# Altium PCB Плата.PcbDoc (part 1 of 2)
Units mm, origin at the board's own origin, x right, y up, seen from the top; angles counter-clockwise.
Board outline 114.75 x 89.87 mm, 2 copper layers (Top Layer, Bottom Layer); 69 components, 75 nets, 338 pads, 343 vias.
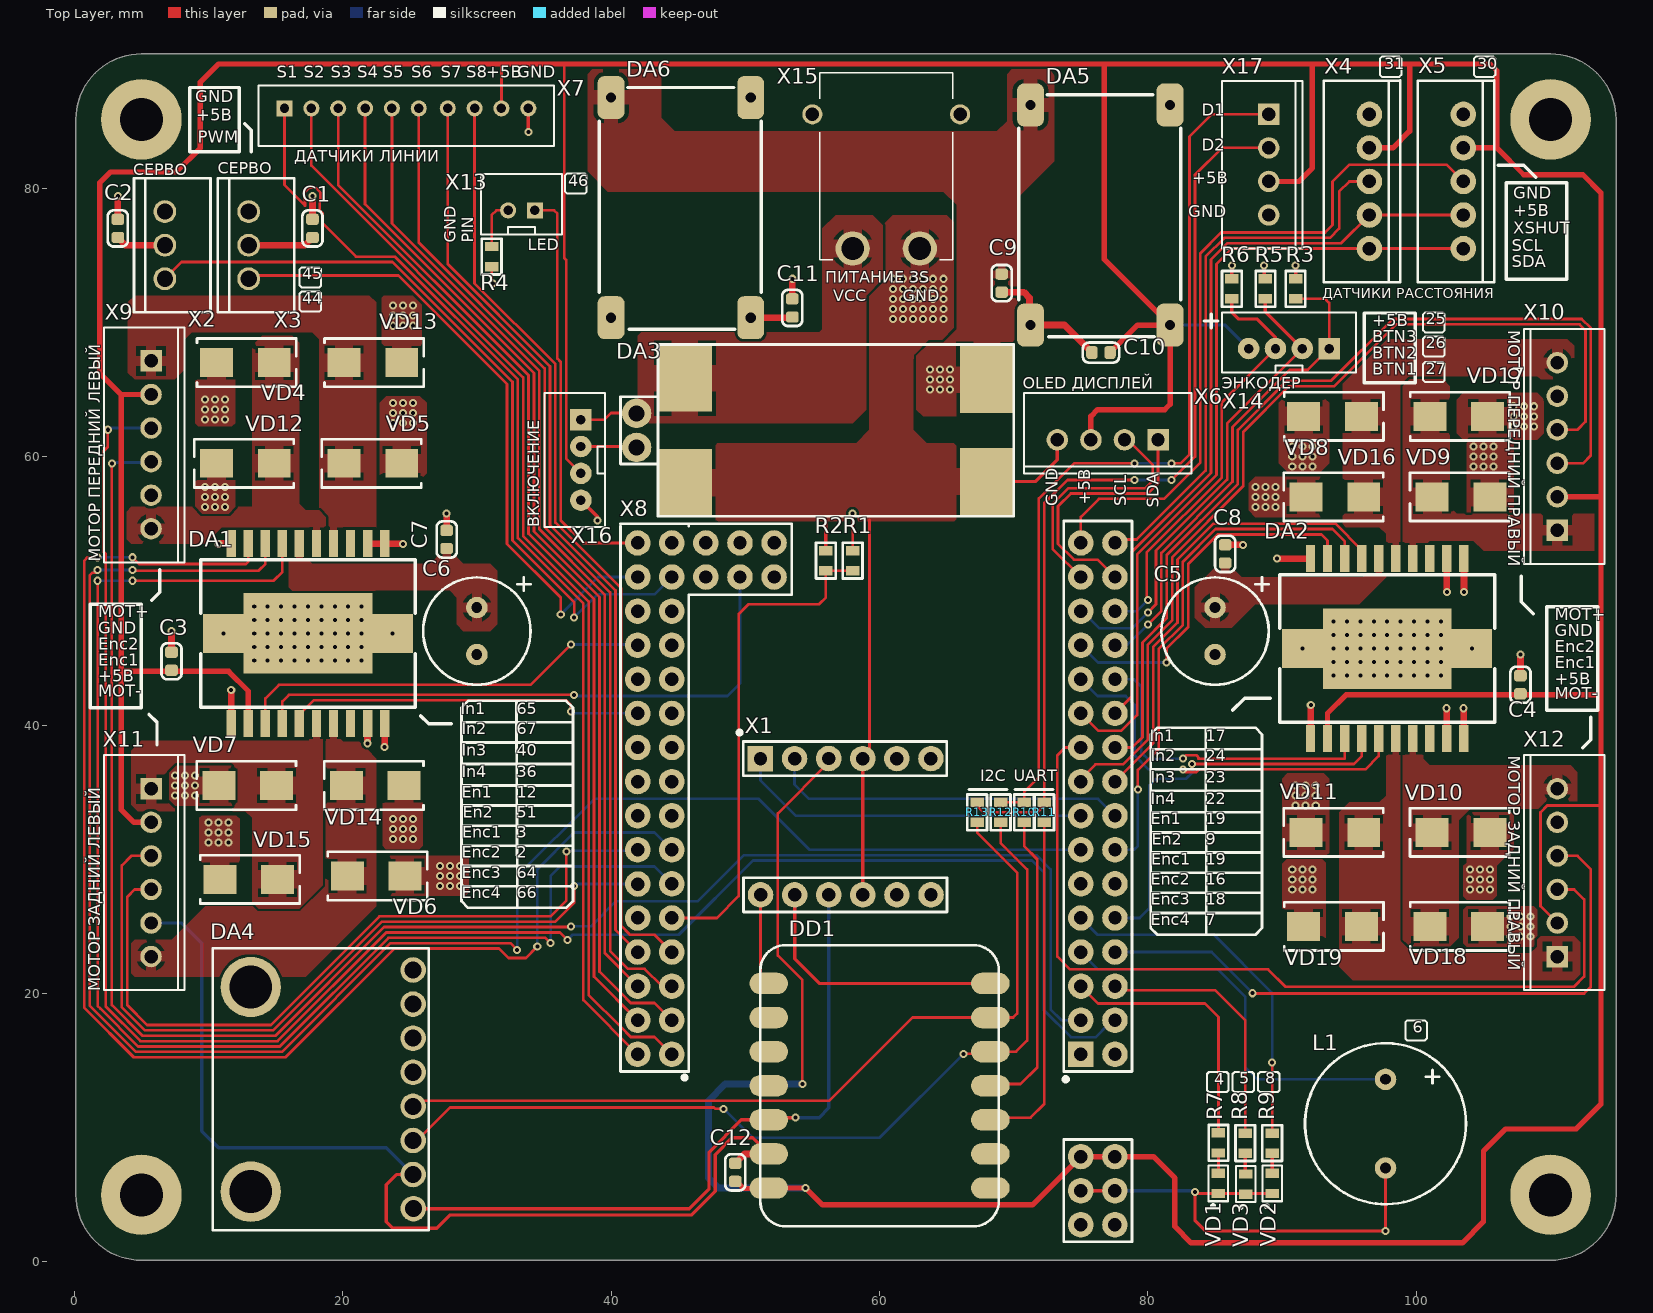
[diagram p0: Top Layer view]
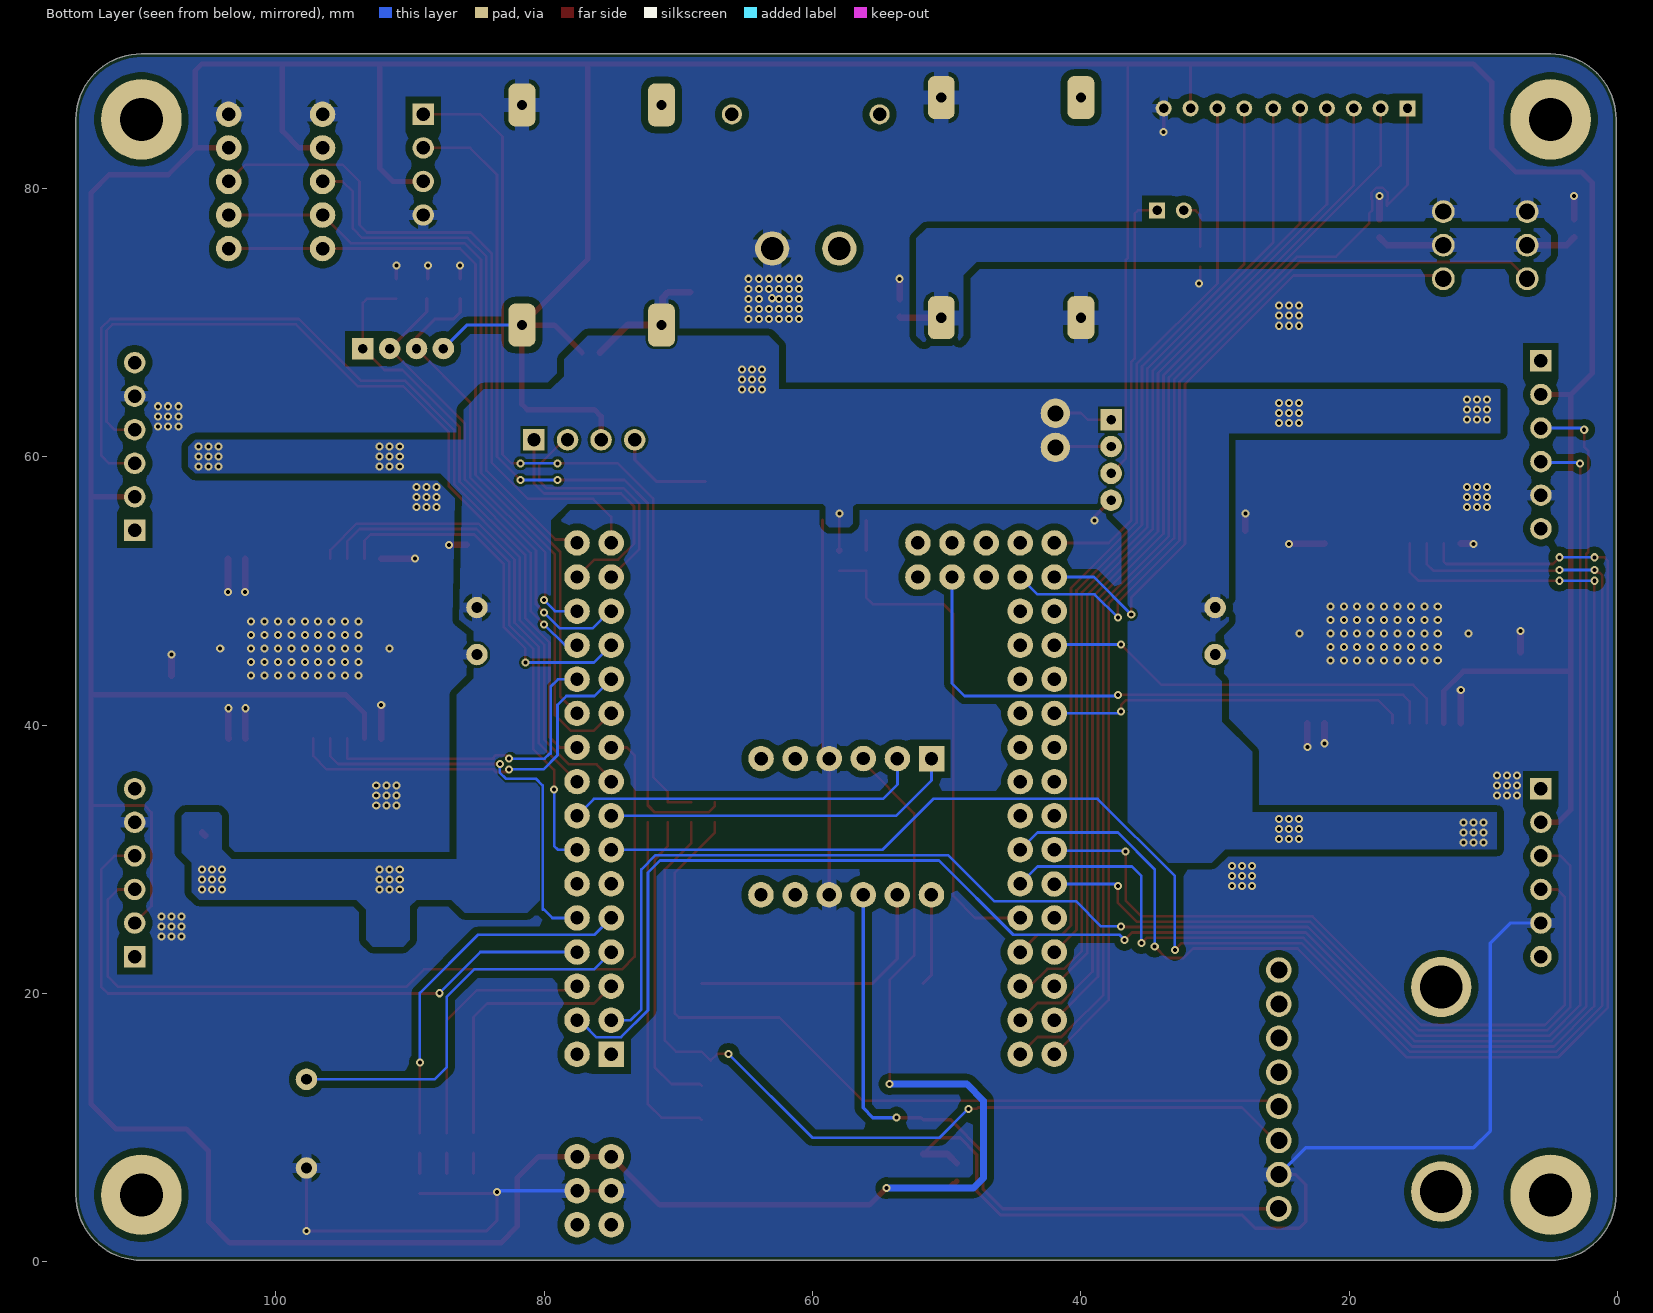
[diagram p1: Bottom Layer view, seen from below]

## Layer stack, top to bottom
Top Solder: solder mask 0.0102, Solder Resist, Dk 3.5
Top Layer: signal copper 0.0356
Dielectric 1: dielectric 0.32, FR-4, Dk 4.8
Bottom Layer: signal copper 0.0356
Bottom Solder: solder mask 0.0102, Solder Resist, Dk 3.5

## Board outline
0.127,85.127 cw(c5.002,85.127) 5.002,90.002 110.002,90.002 cw(c110.002,85.127) 114.877,85.127 114.877,5.002 cw(c110.002,5.002) 110.002,0.127 5.002,0.127 cw(c5.002,5.002) 0.127,5.002

## Design rules (kind name [scope] priority, off if disabled: settings)
AcuteAngle min_acute_angle [OnCopper] p1: minimum=3.50000000000000E+0001 checktracksonly=FALSE // Минимальный угол между примитивами топологии
BoardOutlineClearance board_outline_clearance_std [NOT (OnLayer('Bottom Overlay') OR OnLayer('Top Overlay'))] p1: gap=0.25 ignorepadtopadclearanceinfootprint=FALSE except(0: Arc-SplitContinuation Track-SplitContinuation SMDPad-SplitContinuation THPad-SplitContinuation Via-SplitContinuation Fill-SplitContinuation Poly-SplitContinuation Region-SplitContinuation Text-SplitContinuation) // Отступ элементов топологии от края фрезеруемой печатной платы
Clearance Clearance_gnd_poly [InPolygonClass('GND')] p1: gap=0.5 ignorepadtopadclearanceinfootprint=FALSE except(0.2: Arc-Arc Arc-Track Track-Track)
Clearance clearance_outer_35um_std [OnTopLayer OR OnBottomLayer] p2: gap=0.2 ignorepadtopadclearanceinfootprint=TRUE except(0.25: Arc-Hole Track-Hole SMDPad-Hole THPad-Hole Via-Hole Fill-Hole Poly-Hole Region-Hole Text-Hole) // Зазоры на внешних слоях
Clearance clearance_inner_35um_std [NOT (OnTopLayer Or OnBottomLayer)] p3: gap=0.2 ignorepadtopadclearanceinfootprint=FALSE except(0.25: Arc-Hole Track-Hole SMDPad-Hole THPad-Hole Via-Hole Fill-Hole Poly-Hole Region-Hole Text-Hole) // Зазоры на внутренних слоях
ComponentClearance [All] p1: gap=0 collisioncheckmode=3 verticalgap=0 showdistances=FALSE
DiffPairsRouting diff_pairs_routing [All] p1: maxlimit=0.127 minlimit=0.127 mostfreqgap=0.127 toplayer_minwidth=0.143 toplayer_maxwidth=0.143 toplayer_prefwidth=0.143 bottomlayer_minwidth=0.143 bottomlayer_maxwidth=0.143 bottomlayer_prefwidth=0.143 impedanceprofiledriven=TRUE impedanceprofileid={FD46899E-B5A2-4EF5-A302-5D2DB6A51F35} maxuncoupledlength=12.7 // Правила трассировки дифференциальных пар
HoleSize min_hole_size_std [IsPad] p1: absolutevalues=TRUE maxlimit=5.9 minlimit=0.6 maxpercent=80.000 minpercent=20.000 // Диаметр межслойного переходного отверстия
HoleSize min_hole_size_via_std [IsVia] p2: absolutevalues=TRUE maxlimit=5.9 minlimit=0.3 maxpercent=80.000 minpercent=20.000 // Минимальный диаметр монтажного отверстия
HoleToHoleClearance hole_to_hole_clearance_std [All] p1: gap=0.2 allowstackedmicrovias=FALSE // Минимальное расстояние между краями двух отверстий
MinimumAnnularRing min_via_ar_std [All] p1: minimumring=0.15 // Поясок площадки переходного отверстия (Annular ring VIA)
MinimumAnnularRing min_pad_ar_std [All] p2: minimumring=0.2 // Поясок монтажной контактной площадки (Annular ring PAD)
MinimumSolderMaskSliver min_solder_mask_bridge_std [All] p1: minsoldermaskwidth=0.15 // Мнимальная ширина масочного мостика
PlaneClearance plane_clearance_35um_std [All] p1: clearance=0.2 // Отступ полигона (для слоя plane) от элементов топологии
PlaneConnect [All] p1: planeconnectstyle=Relief reliefexpansion=0.5 reliefentries=4 reliefconductorwidth=0.2 reliefairgap=0.2
PolygonConnect poly_connect_to_pad<=0.3 [(AsMM(PadXSize_AllLayers)<=0.301) or (AsMM(PadYSize_AllLayers)<=0.301)] p1: thpad.connectstyle=Relief thpad.reliefconductorwidth=0.2 thpad.reliefentries=4 thpad.polygonreliefangle="90 Angle" thpad.airgapwidth=0.2 smdpad.connectstyle=Relief smdpad.reliefconductorwidth=0.2 smdpad.reliefentries=4 smdpad.polygonreliefangle="90 Angle" smdpad.airgapwidth=0.2 via.connectstyle=Direct via.reliefconductorwidth=0.254 via.reliefentries=4 via.polygonreliefangle="90 Angle" via.airgapwidth=0.254 // Правила подключения полигонов для падов от 0,3мм и меньше
PolygonConnect poly_connect_to_pad<=0.4 [(AsMM(PadXSize_AllLayers)<=0.401) or (AsMM(PadYSize_AllLayers)<=0.401)] p2: thpad.connectstyle=Relief thpad.reliefconductorwidth=0.26 thpad.reliefentries=4 thpad.polygonreliefangle="90 Angle" thpad.airgapwidth=0.2 smdpad.connectstyle=Relief smdpad.reliefconductorwidth=0.26 smdpad.reliefentries=4 smdpad.polygonreliefangle="90 Angle" smdpad.airgapwidth=0.2 via.connectstyle=Direct via.reliefconductorwidth=0.254 via.reliefentries=4 via.polygonreliefangle="90 Angle" via.airgapwidth=0.254 // Правила подключения полигонов для падов от 0,4 и меньше
PolygonConnect poly_connect_to_pad<=0.6 [(AsMM(PadXSize_AllLayers)<=0.601) or (AsMM(PadYSize_AllLayers)<=0.601)] p3: thpad.connectstyle=Relief thpad.reliefconductorwidth=0.33 thpad.reliefentries=4 thpad.polygonreliefangle="90 Angle" thpad.airgapwidth=0.2 smdpad.connectstyle=Relief smdpad.reliefconductorwidth=0.33 smdpad.reliefentries=4 smdpad.polygonreliefangle="90 Angle" smdpad.airgapwidth=0.2 via.connectstyle=Direct via.reliefconductorwidth=0.254 via.reliefentries=4 via.polygonreliefangle="90 Angle" via.airgapwidth=0.254 // Правила подключения полигонов для падов от 0,6мм и меньше
PolygonConnect poly_connect_to_pad<=0.7 [(AsMM(PadXSize_AllLayers)<=0.701) or (AsMM(PadYSize_AllLayers)<=0.701)] p4: thpad.connectstyle=Relief thpad.reliefconductorwidth=0.46 thpad.reliefentries=4 thpad.polygonreliefangle="90 Angle" thpad.airgapwidth=0.2 smdpad.connectstyle=Relief smdpad.reliefconductorwidth=0.46 smdpad.reliefentries=4 smdpad.polygonreliefangle="90 Angle" smdpad.airgapwidth=0.2 via.connectstyle=Direct via.reliefconductorwidth=0.254 via.reliefentries=4 via.polygonreliefangle="90 Angle" via.airgapwidth=0.254 // Правила подключения полигонов для падов от 0,7мм и меньше
PolygonConnect poly_connect_to_pad<=0.8 [(AsMM(PadXSize_AllLayers)<=0.8)or(AsMM(PadYSize_AllLayers)<=0.8)] p5: thpad.connectstyle=Relief thpad.reliefconductorwidth=0.53 thpad.reliefentries=4 thpad.polygonreliefangle="90 Angle" thpad.airgapwidth=0.3 smdpad.connectstyle=Relief smdpad.reliefconductorwidth=0.53 smdpad.reliefentries=4 smdpad.polygonreliefangle="90 Angle" smdpad.airgapwidth=0.2 via.connectstyle=Direct via.reliefconductorwidth=0.254 via.reliefentries=4 via.polygonreliefangle="90 Angle" via.airgapwidth=0.254 // Правила подключения полигонов для падов от 0,8мм и меньше
PolygonConnect poly_connect_to_pad<=1 [(AsMM(PadXSize_AllLayers)<=1.01)or(AsMM(PadYSize_AllLayers)<=1.01)] p6: thpad.connectstyle=Relief thpad.reliefconductorwidth=0.6 thpad.reliefentries=4 thpad.polygonreliefangle="90 Angle" thpad.airgapwidth=0.3 smdpad.connectstyle=Relief smdpad.reliefconductorwidth=0.6 smdpad.reliefentries=4 smdpad.polygonreliefangle="90 Angle" smdpad.airgapwidth=0.2 via.connectstyle=Direct via.reliefconductorwidth=0.254 via.reliefentries=4 via.polygonreliefangle="90 Angle" via.airgapwidth=0.254 // Правила подключения полигонов для падов от 1мм и меньше
PolygonConnect poly_connect_to_pad<=1.3 [(AsMM(PadXSize_AllLayers)<=1.31)or(AsMM(PadYSize_AllLayers)<=1.31)] p7: thpad.connectstyle=Relief thpad.reliefconductorwidth=0.66 thpad.reliefentries=4 thpad.polygonreliefangle="90 Angle" thpad.airgapwidth=0.3 smdpad.connectstyle=Relief smdpad.reliefconductorwidth=0.86 smdpad.reliefentries=4 smdpad.polygonreliefangle="90 Angle" smdpad.airgapwidth=0.2 via.connectstyle=Direct via.reliefconductorwidth=0.254 via.reliefentries=4 via.polygonreliefangle="90 Angle" via.airgapwidth=0.254 // Правила подключения полигонов для падов от 1,3мм и меньше
PolygonConnect poly_connect_to_pad<=1.6 [(AsMM(PadXSize_AllLayers)<=1.61)or(AsMM(PadYSize_AllLayers)<=1.61)] p8: thpad.connectstyle=Relief thpad.reliefconductorwidth=0.8 thpad.reliefentries=4 thpad.polygonreliefangle="90 Angle" thpad.airgapwidth=0.3 smdpad.connectstyle=Relief smdpad.reliefconductorwidth=1 smdpad.reliefentries=4 smdpad.polygonreliefangle="90 Angle" smdpad.airgapwidth=0.2 via.connectstyle=Direct via.reliefconductorwidth=0.254 via.reliefentries=4 via.polygonreliefangle="90 Angle" via.airgapwidth=0.254 // Правила подключения полигонов для падов от 1,6мм и меньше
PolygonConnect poly_connect_to_pad<=1.8 [(AsMM(PadXSize_AllLayers)<=1.8)or(AsMM(PadYSize_AllLayers)<=1.8)] p9: thpad.connectstyle=Relief thpad.reliefconductorwidth=1 thpad.reliefentries=4 thpad.polygonreliefangle="90 Angle" thpad.airgapwidth=0.3 smdpad.connectstyle=Relief smdpad.reliefconductorwidth=1.2 smdpad.reliefentries=4 smdpad.polygonreliefangle="90 Angle" smdpad.airgapwidth=0.2 via.connectstyle=Direct via.reliefconductorwidth=0.254 via.reliefentries=4 via.polygonreliefangle="90 Angle" via.airgapwidth=0.254 // Правила подключения полигонов для падов от 1,8мм и меньше
PolygonConnect poly_connect_to_pad<=2 [(AsMM(PadXSize_AllLayers)<=2.01)or(AsMM(PadYSize_AllLayers)<=2.01)] p10: thpad.connectstyle=Relief thpad.reliefconductorwidth=1.1 thpad.reliefentries=4 thpad.polygonreliefangle="90 Angle" thpad.airgapwidth=0.3 smdpad.connectstyle=Relief smdpad.reliefconductorwidth=1.4 smdpad.reliefentries=4 smdpad.polygonreliefangle="90 Angle" smdpad.airgapwidth=0.2 via.connectstyle=Direct via.reliefconductorwidth=0.254 via.reliefentries=4 via.polygonreliefangle="90 Angle" via.airgapwidth=0.254 // Правила подключения полигонов для падов от 2мм и меньше
PolygonConnect poly_connect_to_pad<=2.3 [(AsMM(PadXSize_AllLayers)<=2.31)or(AsMM(PadYSize_AllLayers)<=2.31)] p11: thpad.connectstyle=Relief thpad.reliefconductorwidth=1.2 thpad.reliefentries=4 thpad.polygonreliefangle="90 Angle" thpad.airgapwidth=0.3 smdpad.connectstyle=Relief smdpad.reliefconductorwidth=1.4 smdpad.reliefentries=4 smdpad.polygonreliefangle="90 Angle" smdpad.airgapwidth=0.2 via.connectstyle=Direct via.reliefconductorwidth=0.254 via.reliefentries=4 via.polygonreliefangle="90 Angle" via.airgapwidth=0.254 // Правила подключения полигонов для падов от 2,3мм и меньше
PolygonConnect poly_connect_to_pad<=2.5 [(AsMM(PadXSize_AllLayers)<=2.51)or(AsMM(PadYSize_AllLayers)<=2.51)] p12: thpad.connectstyle=Relief thpad.reliefconductorwidth=1.2 thpad.reliefentries=4 thpad.polygonreliefangle="90 Angle" thpad.airgapwidth=0.3 smdpad.connectstyle=Relief smdpad.reliefconductorwidth=1.4 smdpad.reliefentries=4 smdpad.polygonreliefangle="90 Angle" smdpad.airgapwidth=0.2 via.connectstyle=Direct via.reliefconductorwidth=0.254 via.reliefentries=4 via.polygonreliefangle="90 Angle" via.airgapwidth=0.254 // Правила подключения полигонов для падов от 2,5мм и меньше
PolygonConnect poly_connect_to_pad<=2.7 [(AsMM(PadXSize_AllLayers)<=2.71)or(AsMM(PadYSize_AllLayers)<=2.71)] p13: thpad.connectstyle=Relief thpad.reliefconductorwidth=1.4 thpad.reliefentries=4 thpad.polygonreliefangle="90 Angle" thpad.airgapwidth=0.3 smdpad.connectstyle=Relief smdpad.reliefconductorwidth=1.6 smdpad.reliefentries=4 smdpad.polygonreliefangle="90 Angle" smdpad.airgapwidth=0.2 via.connectstyle=Direct via.reliefconductorwidth=0.254 via.reliefentries=4 via.polygonreliefangle="90 Angle" via.airgapwidth=0.254 // Правила подключения полигонов для падов от 2,7мм и меньше
PolygonConnect poly_connect_to_pad<=3 [(AsMM(PadXSize_AllLayers)<=3.01)or(AsMM(PadYSize_AllLayers)<=3.01)] p14: thpad.connectstyle=Relief thpad.reliefconductorwidth=1.6 thpad.reliefentries=4 thpad.polygonreliefangle="90 Angle" thpad.airgapwidth=0.3 smdpad.connectstyle=Relief smdpad.reliefconductorwidth=1.8 smdpad.reliefentries=4 smdpad.polygonreliefangle="90 Angle" smdpad.airgapwidth=0.2 via.connectstyle=Direct via.reliefconductorwidth=0.254 via.reliefentries=4 via.polygonreliefangle="90 Angle" via.airgapwidth=0.254 // Правила подключения полигонов для падов от 3мм и меньше
PolygonConnect poly_connect_to_pad<=7 [(AsMM(PadXSize_AllLayers)<7.01)or(AsMM(PadYSize_AllLayers)<=7.01)] p15: thpad.connectstyle=Relief thpad.reliefconductorwidth=2 thpad.reliefentries=4 thpad.polygonreliefangle="90 Angle" thpad.airgapwidth=0.4 smdpad.connectstyle=Relief smdpad.reliefconductorwidth=2 smdpad.reliefentries=4 smdpad.polygonreliefangle="90 Angle" smdpad.airgapwidth=0.3 via.connectstyle=Direct via.reliefconductorwidth=0.254 via.reliefentries=4 via.polygonreliefangle="90 Angle" via.airgapwidth=0.254 // Правила подключения полигонов для падов от 7мм и меньше
PolygonConnect poly_connect_to_pad [All] p16: thpad.connectstyle=Relief thpad.reliefconductorwidth=0.25 thpad.reliefentries=4 thpad.polygonreliefangle="90 Angle" thpad.airgapwidth=0.2 smdpad.connectstyle=Relief smdpad.reliefconductorwidth=0.25 smdpad.reliefentries=4 smdpad.polygonreliefangle="90 Angle" smdpad.airgapwidth=0.2 via.connectstyle=Direct via.reliefconductorwidth=0.25 via.reliefentries=4 via.polygonreliefangle="90 Angle" via.airgapwidth=0.2 // Правила подключения полигонов общие
RoutingCorners [All] p1 off: cornerstyle=45-Degree minsetback=2.5 maxsetback=2.5
RoutingVias [All] p1: holewidth=0.3 width=0.6 viastyle="Through Hole" minholewidth=0.3 minwidth=0.6 maxholewidth=5.9 maxwidth=6.4
SilkToSilkClearance silk_to_silk_clearance_std [All] p1 off: silktosilkclearance=0.15 // Отступ текста шелкографии от других примитивов шелкографии
SilkToSolderMaskClearance silk_to_solder_mask_clearance_std [IsPad] p1 off: minsilkscreentomaskgap=0.15 clearancetoexposedcopper=FALSE // Минимальное расстояние между элементами шелкографии и вскрытой медью
SolderMaskExpansion solder_mask_expansion_std [All] p1: expansion=0.05 istentingtop=FALSE // Припуск паяльной масски
SupplyNets "Schematic Supply Nets_7" [InNet('Vcc')] p1: voltage=0.000
SupplyNets "Schematic Supply Nets_6" [InNet('+3S')] p2: voltage=0.000
SupplyNets "Schematic Supply Nets_5" [InNet('Vs')] p3: voltage=0.000
SupplyNets "Schematic Supply Nets_3" [InNet('+5B')] p4: voltage=0.000
SupplyNets "Schematic Supply Nets_2" [InNet('GND')] p5: voltage=0.000
SupplyNets "Schematic Supply Nets" [InNet('+3B3')] p6: voltage=0.000
UnRoutedNet [All] p1: checkbadconnections=TRUE
Width width_35um_std [All] p1: maxlimit=10 minlimit=0.2 preferedwidth=0.2 checkconnectedcopper=TRUE // Ширина проводников (общая)
19 further rules are at their usual default settings.

## Classes and differential pairs
polygon class GND: BOTTOM_GND
component class Э3_2: 2 C3 C4 C5 C6 C7 C8 C9 C10 C11 C12 DA1 DA2 DA3 DA4 DA5 DA6 DD1 R10 R11 R12 R13 VD4 VD5 VD6 VD7 VD8 VD9 VD10 VD11 VD12 VD13 VD14 VD15 VD16 VD17 VD18 VD19 X15 X16 X17
component class Э3_1: C1 C2 L1 R1 R2 R3 R4 R5 R6 R7 R8 R9 VD1 VD2 VD3 X1 X2 X3 X4 X5 X6 X7 X8 X9 X10 X11 X12 X13 X14

## Components (designator, comment, footprint, x,y, rotation, side; value= is the part's Value field where it differs from the comment)
C1 "0,1мк" C0603 17.75,77 r90 top
C2 "0,1мк" C0603 3.25,77 r90 top
C3 "100" C0603 7.25,44.75 r90 top
C4 "100" C0603 107.75,43 r90 top
C5 "100мк" CAPALUM_8X11.5_V 85,47 r270 top
C6 "100мк" CAPALUM_8X11.5_V 30,47 r270 top
C7 "100" C0603 27.75,53.825 r270 top
C8 "100" C0603 85.75,52.75 r270 top
C9 "0,1мк" C0603 69.1,72.925 r90 top
C10 "0,1мк" C0603 76.5,67.75 r0 top
C11 "0,1мк" C0603 53.5,71.075 r270 top
C12 "0,1мк" C0603 49.25,6.675 r270 top
DA1 "L298" L298P 17.414,46.823 r270 top
DA2 "L298" L298P 97.825,45.7 r270 top
DA3 "XL-10AL" XL-10AL 56.8,61.95 r0 top
DA4 "MPU6050" MPU6050 18.92,12.86 r180 top
DA5 "4R7" MINI360 81.65,86.2 r270 top
DA6 "4R7" MINI360 50.4,86.75 r270 top
DD1 "XIAO nRF52840" "SEEED STUDIO XIAO NRF52840" 60.002,13.127 r270 top locked
L1 "HC-12085" BUZZER 97.7,10.3 r270 top
R1 "30к" R0603 58,52.25 r270 top
R2 "10к" R0603 56,52.25 r90 top
R3 "10к" R0603 91,72.5 r270 top
R4 "1к" R0603 31.1,74.9 r270 top
R5 "10к" R0603 88.75,72.5 r270 top
R6 "10к" R0603 86.25,72.5 r270 top
R7 "1к" R0603 85.25,8.866 r90 top
R8 "1к" R0603 87.25,8.85 r90 top
R9 "1к" R0603 89.25,8.85 r90 top
R10 "0" R0603 70.773,33.5 r270 top
R11 "0" R0603 72.273,33.5 r270 top
R12 "0" R0603 69.023,33.5 r270 top
R13 "0" R0603 67.273,33.5 r270 top
VD1 "Зеленый светодиод" VD0603 85.25,5.85 r270 top
VD2 "Красный светодиод" VD0603 89.25,5.85 r270 top
VD3 "Синий светодиод" VD0603 87.3,5.8 r270 top
VD4 "MBRS2100" DO-214AA 12.75,67 r0 top
VD5 "MBRS2100" DO-214AA 22.25,59.5 r180 top
VD6 "MBRS2100" DO-214AA 22.5,28.75 r0 top
VD7 "MBRS2100" DO-214AA 12.925,35.5 r180 top
VD8 "MBRS2100" DO-214AA 93.75,63 r0 top
VD9 "MBRS2100" DO-214AA 103.325,57 r180 top
VD10 "MBRS2100" DO-214AA 103.15,25 r0 top
VD11 "MBRS2100" DO-214AA 93.925,32 r180 top
VD12 "MBRS2100" DO-214AA 12.75,59.5 r180 top
VD13 "MBRS2100" DO-214AA 22.25,67 r0 top
VD14 "MBRS2100" DO-214AA 22.425,35.5 r180 top
VD15 "MBRS2100" DO-214AA 13,28.5 r0 top
VD16 "MBRS2100" DO-214AA 93.925,57 r180 top
VD17 "MBRS2100" DO-214AA 103.15,63 r0 top
VD18 "MBRS2100" DO-214AA 103.325,32 r180 top
VD19 "MBRS2100" DO-214AA 93.75,25 r0 top
X1 "Logic Conventor" "LOGIC CONVENTOR" 51.135,37.505 r0 top
X2 "DS1069-3M (CWF-3)" CWF-3 7.3,75.75 r0 top
X3 "DS1069-3M (CWF-3)" CWF-3 13.55,75.75 r0 top
X4 "DS1069-5M (CWF-5)" CWF-5 96.5,80.5 r0 top
X5 "DS1069-5M (CWF-5)" CWF-5 103.5,80.5 r0 top
X6 "DS1069-4M (CWF-4)" CWF-4 80.75,61.25 r270 top
X7 "MW-10M" MW-10M 24.75,85.5 r90 top
X8 "Arduino Mega Pro" "ARDUINO MEGA PRO MINI" 43.252,18.007 r90 top locked
X9 "DS1069-6M (CWF-6)" CWF-6 5.725,67.127 r0 top
X10 "DS1069-6M (CWF-6)" CWF-6 110.502,54.5 r180 top
X11 "DS1069-6M (CWF-6)" CWF-6 5.725,35.25 r0 top
X12 "DS1069-6M (CWF-6)" CWF-6 110.502,22.75 r180 top
X13 "DS1066-02M (MW-2M)" MW-2M 33.325,78.8 r270 top
X14 "DS1066-04M (MW-4M)" MW-4M 90.5,68.5 r270 top
X15 "XT30" "XT30 - DUPLICATE" 60.55,81.362 r0 top
X16 "DS1066-04M (MW-4M)" MW-4M 37.3,59.75 r0 top
X17 "DS1069-4M (CWF-4)" CWF-4 89,85.5 r0 top

## Footprints (in the part's own frame and the unit in brackets; to place one, negate y for a bottom-side part, rotate by r counter-clockwise, add the part's x,y. Pads: shape width x height; smd on the part's side, far side on the other; paste and mask are expansions set on the pad)
"ARDUINO MEGA PRO MINI" [mm]
  rect 1.9x1.9 hole 1: 1(-2.54,-31.75)
  round 1.9 hole 1: 2(-2.54,-34.29) 3(0,-31.75) 7(5.08,-31.75) 8(5.08,-34.29) 13(12.7,-31.75) 14(12.7,-34.29) 19(20.32,-31.75) 20(20.32,-34.29) 25(27.94,-31.75) 26(27.94,-34.29) 31(35.56,-31.75) 32(35.56,-34.29) 33(17.78,1.27) 34(17.78,-1.27) 35(20.32,1.27) 39(25.4,1.27) 40(25.4,-1.27) 45(33.02,1.27) 46(33.02,-1.27) 51(35.56,-6.35) 52(33.02,-6.35) 57(0,1.27) 58(0,-1.27) 63(7.62,1.27) 64(7.62,-1.27) 69(15.24,1.27) 70(15.24,-1.27) 71(-15.24,-34.285) 72(-15.24,-31.745) 73(-12.7,-34.285)
  round 1.9 hole 1 mask+0.102: 4(0,-34.29) 5(2.54,-31.75) 6(2.54,-34.29) 9(7.62,-31.75) 10(7.62,-34.29) 11(10.16,-31.75) 12(10.16,-34.29) 15(15.24,-31.75) 16(15.24,-34.29) 17(17.78,-31.75) 18(17.78,-34.29) 21(22.86,-31.75) 22(22.86,-34.29) 23(25.4,-31.75) 24(25.4,-34.29) 27(30.48,-31.75) 28(30.48,-34.29) 29(33.02,-31.75) 30(33.02,-34.29) 36(20.32,-1.27) 37(22.86,1.27) 38(22.86,-1.27) 41(27.94,1.27) 42(27.94,-1.27) 43(30.48,1.27) 44(30.48,-1.27) 47(35.56,1.27) 48(35.56,-1.27) 49(35.56,-3.81) 50(33.02,-3.81) 53(35.56,-8.89) 54(33.02,-8.89) 55(-2.54,1.27) 56(-2.54,-1.27) 59(2.54,1.27) 60(2.54,-1.27) 61(5.08,1.27) 62(5.08,-1.27) 65(10.146,1.257) 66(10.16,-1.27) 67(12.7,1.27) 68(12.7,-1.27) 74(-12.7,-31.745) 75(-10.16,-34.285) 76(-10.16,-31.745)
  silkscreen extent -16.52,-35.57 37.2,2.54, body extent -17.18,-35.6 37.08,2.5, height 13.94
BUZZER [mm]
  round 1.6 hole 0.8: 1(-3.3,0) 2(3.3,0)
  silkscreen extent -6,-6 6,6, body extent -6,-5.99 6,5.99, height 8.5
C0603 [mm] "Chip Capacitor, 2-Leads, Body 1,60x0,80mm, IPC Medium Density"
  rrect50% 0.85x0.95 smd: 1(-0.675,0) 2(0.675,0)
  Top Layer pour cut-out: -0.254,0.5 -0.254,-0.5 0.254,-0.5 0.254,0.5
  silkscreen extent -1.35,-0.75 1.35,0.75, body extent -0.85,-0.45 0.85,0.45, height 0.9
CAPALUM_8X11.5_V [mm] "Электролитический алюминиевый конденсатор с радиальными выводами 8*11.5мм"
  round 1.6 hole 0.8: 1(-1.75,0) 2(1.75,0)
  silkscreen extent -4,-4 4,4, body extent -4,-3.99 4,3.99, height 11.5
CWF-3 [mm]
  round 1.7 hole 1.2: 1(-0.55,-2.5) 2(-0.55,0) 3(-0.55,2.5)
  silkscreen extent -2.85,-5 2.85,5, body extent -2.9,-5 2.8,5, height 7.7
CWF-4 [mm]
  rect 1.6x1.6 hole 1: 1(0,0)
  round 1.6 hole 1: 2(0,-2.5) 3(0,-5) 4(0,-7.5)
  silkscreen extent -3.5,-10 2.5,2.5, body extent -3.55,-9.95 2.2,2.45, height 7
CWF-5 [mm]
  round 1.9 hole 1: 1(0,-5) 2(0,-2.5) 3(0,0) 4(0,2.5) 5(0,5)
  silkscreen extent -3.4,-7.5 2.3,7.52, body extent -3.45,-7.5 2.3,7.5, height 7
CWF-6 [mm]
  rect 1.6x1.6 hole 1: 1(0,0)
  round 1.6 hole 1: 2(0,-2.5) 3(0,-5) 4(0,-7.5) 5(0,-10) 6(0,-12.5)
  silkscreen extent -3.5,-15 2.5,2.5, body extent -3.53,-15 2.22,2.5, height 7
DO-214AA [mm]
  rect 2.45x2.15 smd: 1(-2.15,0) 2(2.15,0)
  silkscreen extent -3.6,-1.8 3.8,1.8, body extent -2.6,-1.8 2.6,1.8, height 2.4
L298P [mm]
  rect 2x0.7 smd: 1(-6.7,5.715) 2(-6.7,4.445) 3(-6.7,3.175) 4(-6.7,1.905) 5(-6.7,0.635) 6(-6.7,-0.635) 7(-6.7,-1.905) 8(-6.7,-3.175) 9(-6.7,-4.445) 10(-6.7,-5.715) 11(6.7,-5.715) 12(6.7,-4.445) 13(6.7,-3.175) 14(6.7,-1.905) 15(6.7,-0.635) 16(6.7,0.635) 17(6.7,1.905) 18(6.7,3.175) 19(6.7,4.445) 20(6.7,5.715)
  rect 2.9x3.05 smd paste-6: 20(0,6.3)
  rect 6x9.6 smd paste-3: 20(0,0)
  rect 2.9x3.05 smd paste-3: 20(0,-6.3)
  silkscreen extent -5.5,-8 5.5,8, body extent -7.1,-7.95 7.1,7.95, height 3.6
"LOGIC CONVENTOR" [mm]
  rect 1.9x1.9 hole 1: 1(-0.005,-0.005)
  round 1.9 hole 1: 2(2.535,-0.005) 3(5.08,0) 4(7.615,-0.005) 5(10.155,-0.005) 6(12.695,-0.005) 7(0,-10.16) 8(2.54,-10.16) 9(5.085,-10.155) 10(7.62,-10.16) 11(10.16,-10.16) 12(12.7,-10.16)
  silkscreen extent -1.56,-11.44 13.89,1.93, body extent -1.28,-11.46 13.98,1.3, height 5.5
MINI360 [mm]
  rrect50% 3.2x2 hole 0.762: 1(0,0) 2(0,-10.4) 3(16.4,0) 4(16.4,-10.4)
  silkscreen extent -0.75,-11.27 17.27,0.8, body extent -0.73,-11.23 17.27,0.77, height 3.75
MPU6050 [mm] "MPU6050"
  round 1.905 hole 1.27 mask+0.102: 1(-6.35,8.89) 2(-6.33,6.35) 3(-6.33,3.81) 4(-6.33,1.27) 5(-6.33,-1.27) 6(-6.33,-3.81) 7(-6.33,-6.35) 8(-6.33,-8.89)
  round 4.5 hole 3.2: 9(5.766,7.62) 10(5.766,-7.62)
  silkscreen extent -7.5,-10.5 8.6,10.5, body extent -7.62,-10.5 8.57,10.5, height 6.6
MW-2M [mm]
  rect 1.2x1.2 hole 0.7: 1(0.45,1)
  round 1.2 hole 0.7: 2(0.45,-1)
  silkscreen extent -2.25,-3 2.25,3, body extent -2.25,-2.95 2.25,2.95, height 6
MW-4M [mm]
  rect 1.6x1.6 hole 0.7: 1(0.45,3)
  round 1.6 hole 0.7: 2(0.45,1) 3(0.45,-1) 4(0.45,-3)
  silkscreen extent -2.25,-5 2.25,5, body extent -2.25,-4.95 2.25,4.95, height 6
MW-10M [mm]
  rect 1.2x1.2 hole 0.7: 1(0.45,9.08)
  round 1.2 hole 0.7: 2(0.45,7.08) 3(0.45,5.08) 4(0.45,3.08) 5(0.45,1.08) 6(0.45,-0.92) 7(0.45,-3.08) 8(0.45,-5.08) 9(0.45,-7.08) 10(0.45,-9.08)
  silkscreen extent -2.37,-11 2.15,11.02, body extent -2.35,-10.88 2.15,11.02, height 6
R0603 [mm]
  rect 0.7x1 smd: 1(-0.75,0) 2(0.75,0)
  silkscreen extent -1.33,-0.73 1.33,0.73, body extent -0.8,-0.43 0.8,0.43, height 0.45
"SEEED STUDIO XIAO NRF52840" [mm]
  oval 1.6x2.87 smd: 1(7.62,8.255) 2(5.08,8.255) 3(2.54,8.255) 4(0,8.255) 5(-2.54,8.255) 6(-5.08,8.255) 7(-7.62,8.255) 8(-7.62,-8.255) 9(-5.08,-8.255) 10(-2.54,-8.255) 11(0,-8.255) 12(2.54,-8.255) 13(5.08,-8.255) 14(7.62,-8.255)
  silkscreen extent -10.48,-8.89 10.48,8.89, body extent -10.48,-8.89 12,8.89, height 4.51
VD0603 [mm]
  rect 0.7x1 smd: 1(-0.75,0) 2(0.75,0)
  Top Layer pour cut-out: -0.4,0.5 0.4,0.5 0.4,-0.5 -0.4,-0.5
  silkscreen extent -1.33,-0.73 1.8,0.73, body extent -0.82,-0.37 0.82,0.36, height 0.68
XL-10AL [mm]
  rect 4x5 smd: 1(-11.3,3.9) 2(11.2,3.8) 3(-11.3,-3.9) 3(11.2,-3.8)
  round 2.2 hole 1.2: 4(-14.9,1.27) 5(-14.9,-1.27)
  silkscreen extent -16.1,-6.4 13.2,6.4, body extent -13.33,-6.38 13.33,6.38, height 3.12
"XT30 - DUPLICATE" [mm] "XT30"
  round 2.55 hole 1.7: 1(-2.55,-5.862) 2(2.45,-5.862)
  round 1.5 hole 1: 3(5.45,4.138) 4(-5.55,4.138)
  silkscreen extent -5,-6.71 4.9,7.24, body extent -6.7,-6.66 6.6,7.29, height 5.06

## Part data
C1 C2 C9 C10 C11 C12: library part GRM188R71H104KA93D, "Конденсатор кер. 0,1мкФ 50В X7R", Manufacturer=Murata, Voltage=50В, Name=GRM188R71H104KA93D, TKE=X7R
C3 C4 C7 C8: library part CC0603JRNPO9BN101, "Конденсатор кер. 100пФ 50В", Manufacturer=Yageo, Voltage=50В, Name=CC0603JRNPO9BN101, TKE=NP0
C5 C6: library part B41858C6107M, "Конденсатор эл.лит. алюм. 100мкФ 50В", Manufacturer=EPCOS, Voltage=50В, ESR=0,6Ом, Name=B41858C6107
DA1 DA2: "Драйвер двигателя", Manufacturer=China, Name=L298
DA3: Manufacturer=China, Name=XL-10AL
DA4: "Гироскоп и акселерометр", Manufacturer=China, Name=MPU6050
DA5 DA6: "Линейный стабилизатор напряжения 14.4В -> 5В", Manufacturer=China, Name=4R7
DD1: "Микроконтроллер nRF52840", HelpURL=https://wiki.seeedstudio.com/XIAO_BLE/#hardware-overview, Name="XIAO nRF52840"
L1: Manufacturer="Epcos TDK", Name=HC-12085
R1: library part RC0603FR-0730KL, "Резистор 30кОм 0,063Вт 1%", Manufacturer=YAGEO, Tolerance=1%, Name=RC0603FR-0730KL
R2 R3 R5 R6: library part RC0603FR-0710KL, "Резистор 10кОм 0,063Вт 1%", Manufacturer=YAGEO, Tolerance=1%, Name=RC0603FR-0710KL
R4 R7 R8 R9: library part RC0603FR-071KL, "Резистор 1кОм 0,063Вт 1%", Manufacturer=YAGEO, Tolerance=1%, Name=RC0603FR-071KL
R10 R11 R12 R13: library part "Перемычка 0603", "Перемычка 0603", Name="Перемычка 0603"
VD1: library part FYLS-0603BUGC, "Светодтод зеленый SMD Foryard Optoelectronics Co.", Name="Зеленый светодиод"
VD2: library part FYLS-0603BURC, "Светодтод красный SMD Foryard Optoelectronics Co.", Name="Красный светодиод"
VD3: library part FYLS-0603BUBC, "Светодтод синий SMD Foryard Optoelectronics Co.", Name="Синий светодиод"
VD4 VD5 VD6 VD7 VD8 VD9 VD10 VD11 VD12 VD13 VD14 VD15 VD16 VD17 VD18 VD19: "Диод Шоттки 100В 2А", Name=MBRS2100
X1: "Преобразователь уровней", Name="Logic Conventor"
X2 X3: library part CWF-3, "Разъем - 3 конт. прямая вилка на плату", Contact_1=Signal, Contact_2=VCC, Contact_3=GND, Name="DS1069-3M (CWF-3)"
X4 X5: library part CWF-5, "Разъем - 5 конт. прямая вилка на плату", Contact_1=SDA, Contact_2=SCL, Contact_3=XSHUT, Contact_4=VCC, Contact_5=GND, Contact_6=Contact_6, Name="DS1069-5M (CWF-5)"
X6 X17: library part CWF-4, "Разъем - 4 конт. прямая вилка на плату", Contact_3=VCC, Contact_4=GND, Name="DS1069-4M (CWF-4)"
  X6: Contact_1=SDA, Contact_2=SCL
  X17: Contact_1=In1, Contact_2=In2
X7: library part CWF-10, "CWF-10", Contact_1=Sinnal1, Contact_2=Sinnal2, Contact_3=Sinnal3, Contact_4=Sinnal4, Contact_5=Sinnal5, Contact_6=Sinnal6, Contact_7=Sinnal7, Contact_8=Sinnal8, Contact_9=VCC, Contact_10=GND, Name=MW-10M
X8: library part "Arduino Mega Pro Mini", "Arduino Mega Pro Mini", Name="Arduino Mega Pro"
X9 X10 X11 X12: library part CWF-6, "Разъем - 6 конт. прямая вилка на плату", Contact_1=MOT1, Contact_2=VCC, Contact_3=ENC1, Contact_4=ENC2, Contact_5=GND, Contact_6=MOT2, Name="DS1069-6M (CWF-6)"
X13: library part MW-2M, "Разъем - 2 конт. прямая вилка на плату", Contact_1=Singal, Contact_2=GND, Name="DS1066-02M (MW-2M)"
X14 X16: library part MW-4M, "Разъем - 4 конт. прямая вилка на плату", Contact_4=GND, Name="DS1066-04M (MW-4M)"
  X14: Contact_1=BNT1, Contact_2=BNT2, Contact_3=BNT3
  X16: Contact_1=BTN1, Contact_2=BTN2, Contact_3=LED
X15: Contact_1=Vbat, Contact_2=GND, Name=XT30

## Free pads (board coordinates)
  round 6 hole 3.2: 1(5.002,85.127) 1(5.002,5.002) 1(110.002,5.002) 1(110.002,85.127)

## Via types
v1: diameter 0.6, hole 0.3, Top Layer to Bottom Layer, tented both sides, 342 vias
v2: diameter 0.6, hole 0.3, Top Layer to Bottom Layer, 1 vias

## Nets (pads, with @x,y where several pads share a name; then routed paths per layer and width w, separated by ;. In a path a pad name is that pad's centre, name@x,y a point inside that pad or via, vN(x,y) a via of type N, cw(c..) or ccw(c..) an arc to the next point about the centre after c; other vN are vias at no path point)
+3B3: DA4.1 DD1.12 X1.9 | length 51.5
  Top Layer w0.25: DA4.1@25.27,3.97 45.834,3.97 47.3,5.436 47.3,8.186 49.701,10.587 DD1.12@51.747,10.587 51.91,10.75 v1(53.75,10.75)
  Bottom Layer w0.25: v1(53.75,10.75) 55.5,10.75 56.22,11.47 X1.9@56.22,27.35
+3S: DA3.1 X15.1
+5B: C3.1 C4.1 C10.2 C12.2 DA1.12 DA2.12 DA5.3 DD1.14 X1.3 X4.4 X5.4 X6.3 X7.9 X8.75 X8.76 X9.2 X10.2 X11.2 X12.2 X14.4 X16.3 X17.3 | length 528.2
  Top Layer w0.2: 36.5,89.25 36.5,74.814 36.65,74.664 36.65,59.85 X16.3@37.75,58.75 ; v1(54.25,13.25) 54.25,21 52.425,22.825 52.425,33.425 56.215,37.215 X1.3@56.215,37.505 ; X12.2@110.502,25.25 109.25,26.502 109.25,33.5 109.75,34 113.75,34
  Top Layer w0.25: X7.9@31.83,85.95 31.83,89.25
  Top Layer w0.4: X11.2@5.725,32.75 4.45,32.75 3.5,33.7 3.5,44 ; X9.2@5.725,64.627 3.5,64.627 ; DA1.12@12.969,40.123 12.969,42.531 11.5,44 3.5,44 ; C12.2@49.25,6 49.425,5.825 49.522,5.825 49.88,5.467 51.707,5.467 DD1.14@51.747,5.507 v1@54.5,5.507 ; v1(54.5,5.5) 55.75,4.25 71.4,4.25 X8.76@74.997,7.847 X8.75@77.537,7.847 80.403,7.847 82,6.25 82,2.644 83.219,1.425 103.425,1.425 105,3 105,8.25 106.65,9.9 111.9,9.9 113.75,11.75 113.75,34 113.75,42.25 ; X6.3@75.75,61.25 75.75,63 76.25,63.5 81.25,63.5 81.65,63.9 DA5.3@81.65,69.8 ; C10.2@77.175,67.75 79.225,69.8 DA5.3@81.65,69.8 ; X17.3@89,80.5 91.25,80.5 92.25,81.5 92.25,89.25 ; DA2.12@93.38,39 93.38,40.88 94.75,42.25 113.75,42.25 ; X4.4@96.5,83 98.25,83 99.5,84.25 99.5,89.25 ; X5.4@103.5,83 106,83 ; X10.2@110.502,57 113.75,57 ; 3.5,44 3.5,64.627 ; 3.5,64.627 1.9,66.227 1.9,80.4 2.7,81.2 7.6,81.2 9.4,83 9.4,87.9 10.75,89.25 31.83,89.25 36.5,89.25 76.75,89.25 ; 76.75,89.25 92.25,89.25 ; 76.75,89.25 76.75,74.7 DA5.3@81.65,69.8 ; 92.25,89.25 99.5,89.25 ; 99.5,89.25 105.5,89.25 106,88.75 106,83 ; 106,83 108,81 112.4,81 113.75,79.65 113.75,57 ; 113.75,42.25 113.75,57
  Bottom Layer w0.25: DA5.3@81.65,69.8 85.75,69.8 X14.4@87.5,68.05
  Bottom Layer w0.5: v1(54.25,13.25) 48.5,13.25 47.25,12 47.25,6.25 48,5.5 v1(54.5,5.5)
BTN1: R3.2 X8.26 X14.1 | length 36.1
  Top Layer w0.2: v1(80,47.5) 81,48.5 81,52.828 86.3,58.128 86.3,62.2 90.55,66.45 91.9,66.45 X14.1@93.5,68.05 93.5,71.457 93.207,71.75 R3.2@91,71.75
  Bottom Layer w0.2: X8.26@77.542,45.947 78.447,45.947 v1(80,47.5)
BTN2: R5.2 X8.27 X14.2 | length 35.3
  Top Layer w0.2: v1(80,48.399) 80.6,48.999 80.6,52.994 85.9,58.294 85.9,62.45 X14.2@91.5,68.05
  Top Layer w0.25: R5.2@88.75,71.75 88.75,70.8 X14.2@91.5,68.05
  Bottom Layer w0.2: X8.27@75.002,48.487 75.113,48.487 76.4,47.2 78.801,47.2 v1(80,48.399)
BTN3: R6.2 X8.28 X14.3 | length 31.4
  Top Layer w0.2: v1(80,49.3) 79.9,49.4 79.9,52.86 85.5,58.46 85.5,64.05 X14.3@89.5,68.05
  Top Layer w0.25: R6.2@86.25,71.75 86.25,70.75 86.75,70.25 88.15,70.25 89.5,68.9 X14.3@89.5,68.05
  Bottom Layer w0.2: X8.28@77.542,48.487 79.187,48.487 v1(80,49.3)
ENC1A: X8.4 X9.3 | length 140.7
  Top Layer w0.2: v1(2.5,62) 2.5,60.722 2.2,60.422 2.2,52.899 2.35,52.749 2.35,19.031 4.931,16.45 15.147,16.45 23.247,24.55 36.2,24.55 v1(36.75,24)
  Bottom Layer w0.2: v1(2.5,62) 2.627,62.127 X9.3@5.725,62.127 ; v1(36.75,24) 37.127,24.377 41.504,24.377 45.04,24.377 50.57,29.907 71.343,29.907 72.25,29 72.25,18.75 74.25,16.75 76.116,16.75 77,17.634 77.169,17.634 X8.4@77.542,18.007
ENC1B: X8.65 X11.3 | length 57.5
  Top Layer w0.2: X11.3@5.725,30.25 4.25,30.25 3.55,29.55 3.55,18.963 5.263,17.25 14.816,17.25 22.916,25.35 35.85,25.35 37.25,26.75 v1(37.25,28)
  Bottom Layer w0.2: v1(37.25,28) 37.403,28.153 X8.65@41.995,28.153
ENC1C: X8.20 X10.3 | length 70.4
  Top Layer w0.2: X8.20@77.542,38.327 78.827,38.327 79.592,39.092 79.592,46.155 81.4,47.963 81.4,52.663 86.7,57.963 86.7,61.999 90.351,65.65 93.65,65.65 98.25,70.25 112.316,70.25 113,69.566 113,60.099 112.401,59.5 X10.3@110.502,59.5
ENC1D: X8.19 X12.3 | length 65.5
  Top Layer w0.2: X8.19@75.002,38.327 73.827,38.327 73.25,37.75 73.25,22.75 74.203,21.797 88.953,21.797 90.25,20.5 111.75,20.5 112.5,21.25 112.5,27 111.75,27.75 X12.3@110.502,27.75
ENC2A: X8.3 X9.4 | length 133.3
  Top Layer w0.2: v1(2.8,59.5) 2.8,19.147 5.097,16.85 14.981,16.85 23.081,24.95 36.95,24.95 v1(37,25)
  Bottom Layer w0.2: v1(2.8,59.5) 2.863,59.563 5.661,59.563 X9.4@5.725,59.627 ; v1(37,25) 38.5,25 40.377,26.877 46.46,26.877 49.89,30.307 71.693,30.307 72.75,29.25 72.75,18.816 73.559,18.007 X8.3@75.002,18.007
ENC2B: X8.67 X11.4 | length 56.3
  Top Layer w0.2: X11.4@5.725,27.75 4.5,27.75 3.95,27.2 3.95,19.128 5.428,17.65 14.65,17.65 22.75,25.75 35.5,25.75 36.65,26.9 36.65,30.551 v1(36.674,30.576)
  Bottom Layer w0.2: v1(36.674,30.576) 36.74,30.641 41.916,30.641 X8.67@41.982,30.707